# Altium PCB SynchConv_pcb.PcbDoc
Units mil, origin at the board's own origin, x right, y up, seen from the top; angles counter-clockwise.
Board outline 3543.26 x 2756.28 mil, 2 copper layers (Top Layer, Bottom Layer); 40 components, 21 nets, 96 pads, 289 vias.
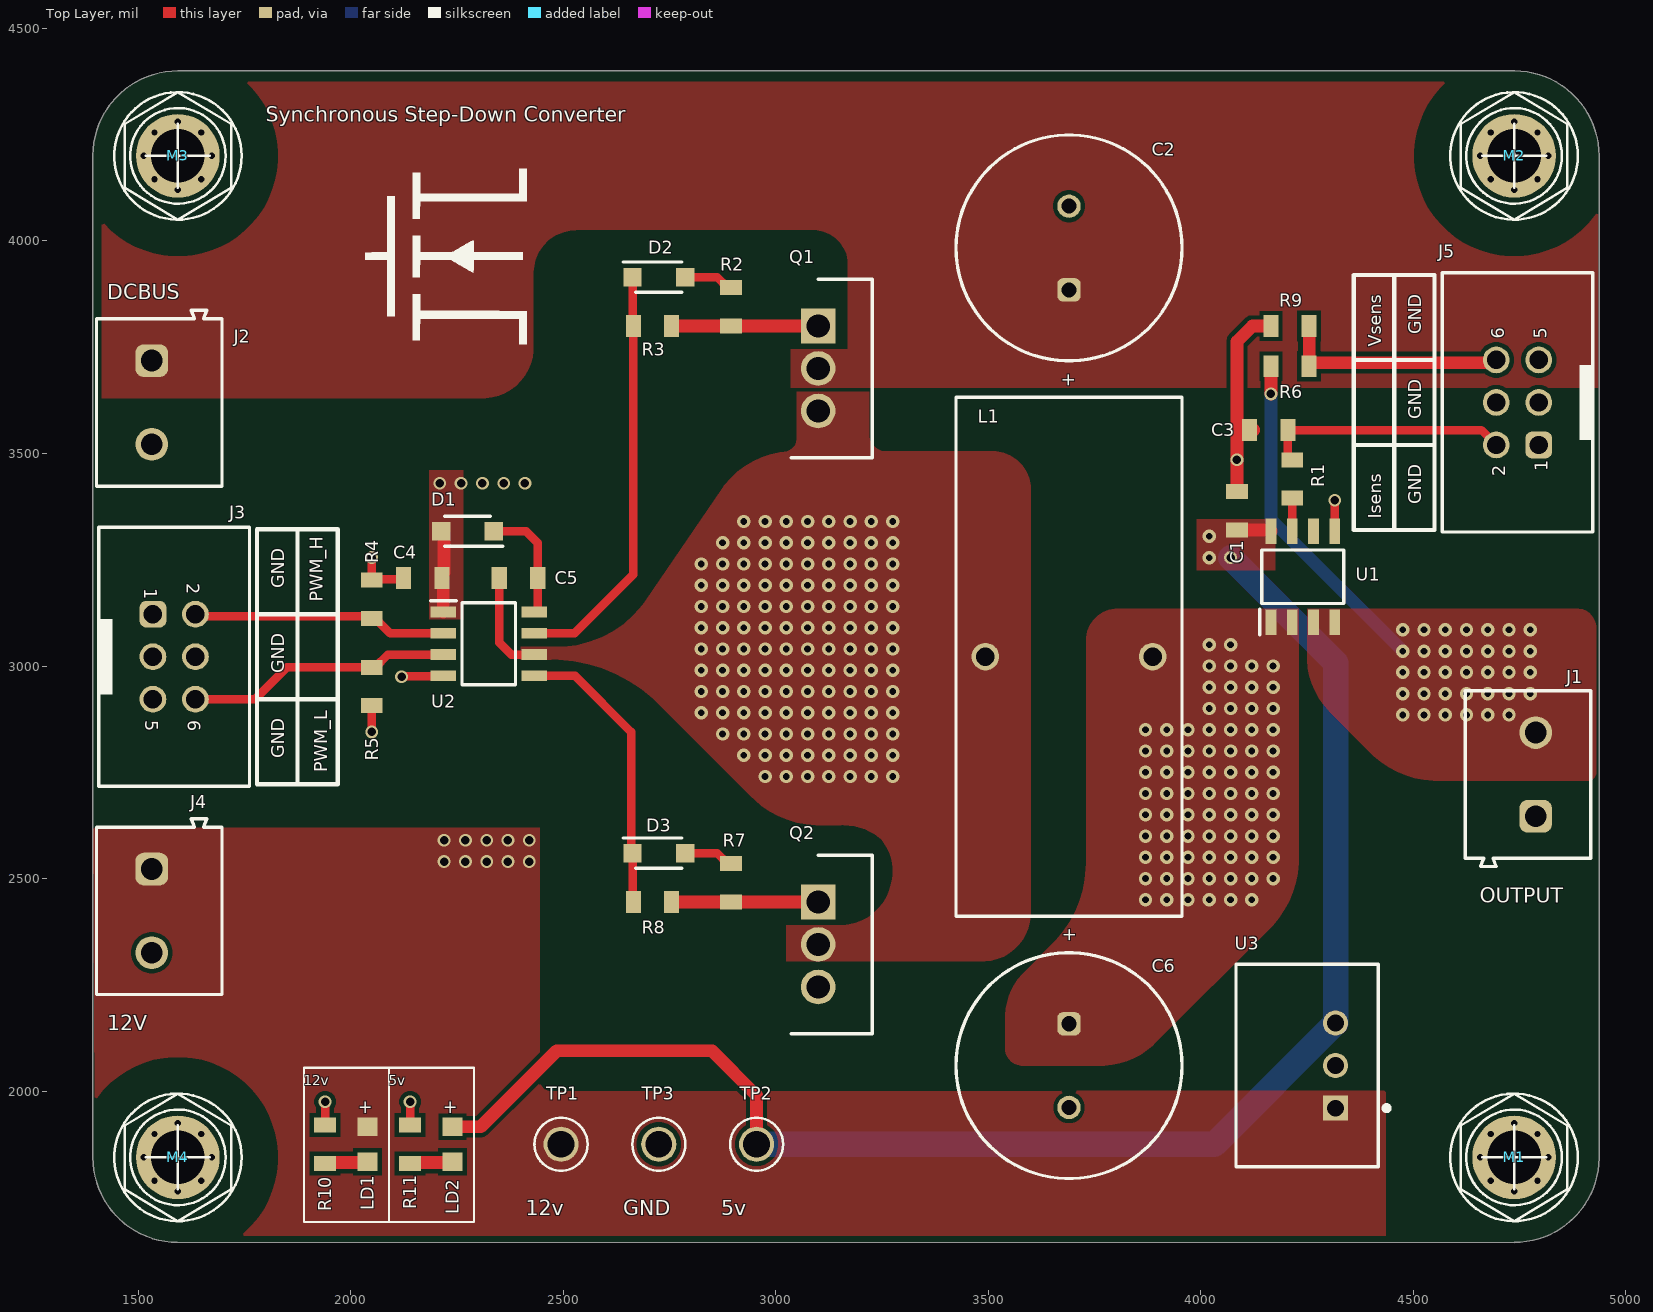
[diagram p0: Top Layer view]
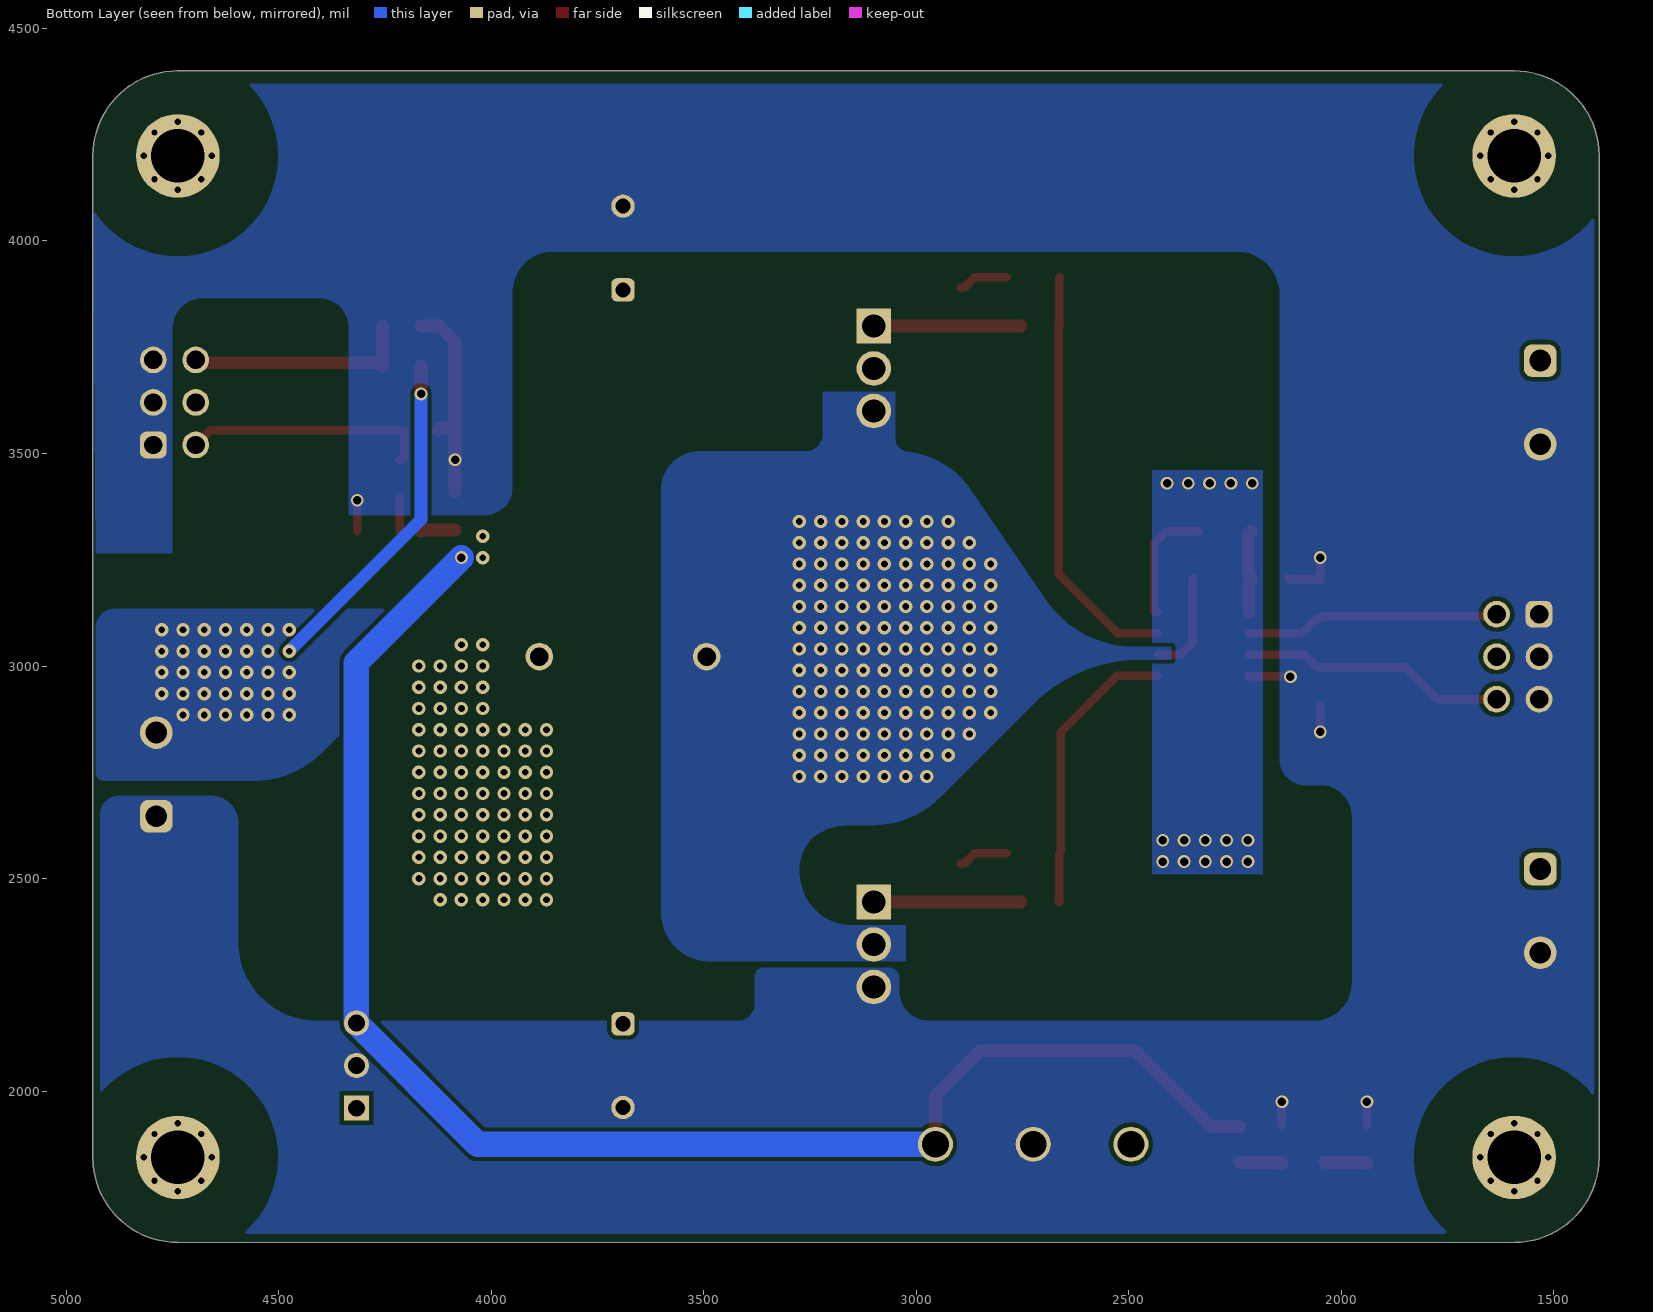
[diagram p1: Bottom Layer view, seen from below]
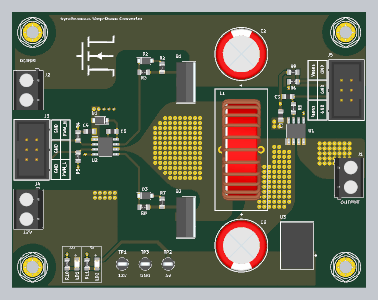
[diagram p2: 3D render of the assembled board from above, using the file's embedded part models]

## Layer stack, top to bottom
Top Solder: solder mask 0.4, Solder Resist, Dk 3.5
Top Layer: signal copper 1.4
Dielectric 1: dielectric 12.6, FR-4, Dk 4.8
Bottom Layer: signal copper 1.4
Bottom Solder: solder mask 0.4, Solder Resist, Dk 3.5

## Board outline
1592.65,1644.1 cw(c1593.74,1844.09) 1393.75,1844.1 1394,1844.1 1394,4201.09 1393.75,4201.09 cw(c1593.74,4200) 1593.75,4399.99 1593.75,4400 4738.1,4400 4738.1,4399.99 cw(c4737.01,4200) 4937,4199.99 4937.01,4199.99 4937.01,1843 4937,1843 cw(c4737.01,1844.09) 4737,1644.1 4737,1643.72

## Design rules (kind name [scope] priority, off if disabled: settings)
Clearance [All] p1: gap=10 ignorepadtopadclearanceinfootprint=FALSE except(0: Arc-Hole Track-Hole SMDPad-Hole THPad-Hole Via-Hole Fill-Hole Poly-Hole Region-Hole Text-Hole)
Height [All] p1: minheight=0 maxheight=10000 prefheight=500
PolygonConnect [All] p1: connectstyle=Direct reliefconductorwidth=10 reliefentries=4 polygonreliefangle="90 Angle" airgapwidth=10
RoomDefinition SynchConv_sch [InComponentClass('SynchConv_sch')] p1: confinementstyle=ConfineIn formatcopy=TRUE lockcomponents=FALSE outline 515,565 16025,565 16025,5670 515,5670
RoutingVias [All] p1: holewidth=20 width=30 viastyle="Through Hole" minholewidth=20 minwidth=30 maxholewidth=20 maxwidth=30
SolderMaskExpansion [All] p1: expansion=4 istentingtop=FALSE
Width [All] p1: maxlimit=1000 minlimit=10 preferedwidth=20 minimp=50.000000 maximp=50.000000 favimp=50.000000
29 further rules are at their usual default settings.

## Components (designator, comment, footprint, x,y, rotation, side; value= is the part's Value field where it differs from the comment)
C1 "100nF" CAP_0805 4085,3365 r270 top
C2 "470uF" WCAP-ATG5_D13H20 3690,3983.43 r270 top
C3 "100nF" CAP_0805 4160,3555 r0 top
C4 "100nF" CAP_0805 2170,3207 r0 top
C5 "100nF" CAP_0805 2395,3207 r0 top
C6 "470uF" WCAP-ATG5_D13H20 3690,2060 r90 top
D1 "SS34LWHRVG" SODFL3718X102N 2275,3317 r180 top
D2 "SS34LWHRVG" SODFL3718X102N 2725,3915 r0 top
D3 "SS34LWHRVG" SODFL3718X102N 2725,2560 r0 top
J1 "691502710002" 691502710002 4770,2745 r90 top
J2 "691502710002" 691502710002 1550,3620 r270 top
J3 "61200621621" 61200621621 1585,3022 r270 top
J4 "691502710002" 691502710002 1550,2424 r270 top
J5 "61200621621" 61200621621 4745,3620 r90 top
L1 "59µH, 5.4A" 744134 3690,3022 r90 top
LD1 "Green, 3.2V" WL-SMCW_0805 2040,1875 r90 top
LD2 "Green, 3.2V" WL-SMCW_0805 2240,1875 r90 top
M1 "mounting hole plated" "M3_Mountingholes plated" 4737.01,1844.09 r0 top
M2 "mounting hole plated" "M3_Mountingholes plated" 4737.01,4200 r0 top
M3 "mounting hole plated" "M3_Mountingholes plated" 1593.74,4200 r0 top
M4 "mounting hole plated" "M3_Mountingholes plated" 1593.74,1844.09 r0 top
Q1 "IRFB3077PBF" TO254P483X1016X1994-3P 3100,3800 r270 top
Q2 "IRFB3077PBF" TO254P483X1016X1994-3P 3100,2445 r270 top
R1 "1k" Res_0805 4215,3440 r270 top
R2 "4R7" Res_0805 2895,3845 r270 top
R3 "10R" Res_0805 2710,3800 r180 top
R4 "10k" Res_0805 2050,3157 r270 top
R5 "10k" Res_0805 2050,2952 r90 top
R6 "3k" Res_0805 4210,3705 r0 top
R7 "4R7" Res_0805 2895,2490 r270 top
R8 "10R" Res_0805 2710,2445 r180 top
R9 "1k" Res_0805 4210,3800 r180 top
R10 "1k" Res_0805 1940,1875 r270 top
R11 "1k" Res_0805 2140,1875 r270 top
TP1 "TP_big" TP_big 2495,1875 r0 top
TP2 "TP_big" TP_big 2955,1875 r0 top
TP3 "TP_big" TP_big 2725,1875 r0 top
U1 "TMCS1107A4BQDRQ1" SOIC127P600X175-8N 4240,3210 r90 top
U2 "FL73282MX" SOIC127P600X175-8N 2325,3052 r0 top
U3 "8-42Vin, 5Vout, 1Aout" 173010x35 4250,2060 r90 top

## Footprints (in the part's own frame and the unit in brackets; to place one, negate y for a bottom-side part, rotate by r counter-clockwise, add the part's x,y. Pads: shape width x height; smd on the part's side, far side on the other; paste and mask are expansions set on the pad)
173010x35 [mm] "Fixed Step Down Regulator Module, SIP-3, body 11.6x8mm"
  rect 1.5x1.5 hole 1: 1(-2.54,-1.7)
  round 1.5 hole 1: 2(0,-1.7) 3(2.54,-1.7)
  silkscreen extent -6.05,-4.9 6.05,4.25, body extent -5.8,-4 5.8,4, height 10.45
744134 [mm] "THT Leaded Toroidal Storage Choke, body 31x13.5mm"
  round 1.65 hole 1.1: 1(0,5) 2(0,-5)
  silkscreen extent -15.5,-6.75 15.5,6.75, body extent -12.96,-5.45 12.96,5.45, height 25.56
61200621621 [mm] "6 pins, straight, gold plating"
  rrect50% 1.6x1.6 hole 1.1: 1(-2.54,-1.27)
  round 1.6 hole 1.1: 2(-2.54,1.27) 3(0,-1.27) 4(0,1.27) 5(2.54,-1.27) 6(2.54,1.27)
  silkscreen extent -7.74,-4.5 7.74,4.5, body extent -7.64,-4.43 7.64,4.75, height 9.13
691502710002 [mm] "5,00mm - modular - Reflow compatible - Horizontal entry with pressure clamp - 02p"
  rrect50% 1.95x1.95 hole 1.3: 1(-2.5,-0.45)
  round 1.95 hole 1.3: 2(2.5,-0.45)
  silkscreen extent -5.5,-3.75 5,3.75, body extent -5.5,-3.75 5,3.75, height 10.1
CAP_0805 [mm] "Ceramic Capacitors, body 2x1.25mm"
  rect 0.9x1.3 smd: 1(-1.15,0) 2(1.15,0)
  body extent -1,-0.62 1,0.63, height 0.8
"M3_Mountingholes plated" [mm]
  round 5 hole 3.2: 1(0,0)
  silkscreen extent -3.81,-3.81 3.81,3.81
Res_0805 [mm] "Thick Film Resistors, SMT, body size 2x1.25mm"
  rect 0.9x1.3 smd: 1(-1.143,0) 2(1.143,0)
  body extent -0.98,-0.64 1.02,0.61, height 0.6
SODFL3718X102N [mm]
  rect 1.09x1.11 smd: 1(-1.575,0) 2(1.575,0)
  silkscreen extent -2.12,-0.9 1.38,0.9, body extent -1.85,-0.9 1.85,0.9, height 1.02
SOIC127P600X175-8N [mm]
  rect 1.525x0.65 smd: 1(-2.712,1.905) 2(-2.712,0.635) 3(-2.712,-0.635) 4(-2.712,-1.905) 5(2.712,-1.905) 6(2.712,-0.635) 7(2.712,0.635) 8(2.712,1.905)
  silkscreen extent -3.47,-2.45 1.6,2.58, body extent -3,-2.45 3,2.45, height 1.75
TO254P483X1016X1994-3P [mm]
  rect 2.07x2.07 hole 1.38: 1(0,0)
  round 2.07 hole 1.38: 2(2.54,0) 3(5.08,0)
  silkscreen extent -2.8,-1.61 7.88,3.22, body extent -2.54,-1.61 7.62,3.22, height 18.86
TP_big [mm]
  round 2.1 hole 1.6 paste-2: 1(0,0)
  silkscreen extent -1.59,-1.58 1.59,1.58, body extent -1.59,-1.59 1.59,1.59, height 8.13
WCAP-ATG5_D13H20 [mm] "Aluminum Electrolytic Capacitors, 13x20mm"
  rrect50% 1.4x1.4 hole 0.9: 1(2.5,0)
  round 1.4 hole 0.9: 2(-2.5,0)
  silkscreen extent -6.75,-6.75 6.75,6.75, body extent -6.49,-6.5 6.5,6.5, height 20.31
WL-SMCW_0805 [mm] "SMD Mono-color Chip LED, body 2.0x1.25mm"
  rect 1.1x1.2 smd: 1(-1.05,0) 2(1.05,0)
  body extent -1,-0.63 1,0.62, height 0.7

## Part data
C1 C3 C4 C5: library part Cap_0805, "capacitor 0805", Capacitance Tolerance=+/-10%, Isolation Resistance=>=5GOhm, Manufacturer="Wurth Elektronik", Manufacturer Part Number=885012207098, Operating Temperature="-55 to +125degC", Rated Voltage=50VDC, Capacitance=100nF, Ceramic Type=X7R, ComponentLink1Description=Manufacturer, ComponentLink1URL=http://www.we-online.de, ComponentLink2Description=Datasheet, ComponentLink2URL=https://www.we-online.com/catalog/datasheet/885012207098.pdf, Dissipation Factor=#NAME?, Height=0.8mm, Mounting Technology=SMT, Packaging="Tape and Reel", Published Date="May 2020", Size=0805, Technical Reference=X7R0805104K050DFCT10000
C2 C6: library part 860020778021, "WCAP-ATG5 Aluminum Electrolytic Capacitor, Radial THT, D13xH20mm, 470uF, 63V", Capacitance Tolerance=+/-20%, Leakage Current=296.1uA, Manufacturer="Wurth Elektronik", Operating Temperature Max=105°C, Operating Temperature Min=-40°C, Rated Voltage (DC)=63V, Ripple Current=690mA, Capacitance=470uF, Category="Aluminum Electrolytic Capacitors", ComponentLink1Description="Manufacturer Link", ComponentLink1URL=https://www.we-online.com/redexpert/article/860020778021?ad, ComponentLink2Description=Datasheet, ComponentLink2URL=https://www.we-online.com/redexpert/spec/860020778021?ad, Diameter=13mm, Dissipation Factor=9%, Endurance=2000h, Height=20mm, Manufacturer Part Number=860020778021, Match Code=WCAP-ATG5, Mount="Through Hole", Packaging="Ammo Pack", Technical Reference=ATDI200471M063DSPACB000
D1 D2 D3: "Diode", Manufacturer_Name="Taiwan Semiconductor", Mouser Part Number=821-SS34LWHRVG, Arrow Part Number=SS34LWHRVG, Arrow Price/Stock=https://www.arrow.com/en/products/ss34lwhrvg/taiwan-semiconductor?region=nac, Datasheet Link=https://datasheet.datasheetarchive.com/originals/distributors/DKDS-20/389381.pdf, Height=1.02mm, Manufacturer_Part_Number=SS34LWHRVG, Mouser Price/Stock=https://www.mouser.co.uk/ProductDetail/Taiwan-Semiconductor/SS34LWHRVG?qs=5aG0NVq1C4zYvYQjFNyRbA%3D%3D
J1 J2 J4: "WR-TBL Series 5027 Horizontal Entry Modular, Through Hole, pitch 5mm, 2p", Manufacturer="Wurth Elektronik", Operating Temperature Max=130°C, Operating Temperature Min=-40°C, Rated Current=15A, Working Voltage=300V, Application="Pressure Clamp", Category="Terminal Blocks", ComponentLink1Description="Manufacturer Link", ComponentLink1URL=https://www.we-online.com/redexpert/article/691502710002?ad, ComponentLink2Description=Datasheet, ComponentLink2URL=https://www.we-online.com/redexpert/spec/691502710002?ad, Manufacturer Part Number=691502710002, Match Code=WR-TBL, Modularity=Yes, Mount="Through Hole", Orientation=Horizontal, Packaging=Box, PCB/Cable/Panel=PCB, Pin Number=2, Pitch=5mm
J3 J5: "WR-BHD Box Header, Male PCB side, pitch 2.54mm, THT, Straight, 6p", Contact Resistance=20mOhm, Insulation Resistance=1000MOhm, Manufacturer="Wurth Elektronik", Operating Temperature="-40 to +105degC", Rated Current=3A, Withstanding Voltage=500VAC, Working Voltage=250VAC, ComponentLink1Description=Manufacturer, ComponentLink1URL=http://www.we-online.de, ComponentLink2Description=Datasheet, ComponentLink2URL=https://www.we-online.com/catalog/datasheet/61200621621.pdf, Gender="Male PCB side", Length=15.28mm, Manufacturer Part Number=61200621621, Mounting Technology=THT, Packaging=Tray, Pin Number=6, Pitch=2.54mm, Published Date="August 2021", Type=Straight
L1: library part 744134, "WE-SI THT Leaded Toroidal Storage Choke, 59µH, 5.4A, 0.05Ω", DC Resistance Max=0.05Ω, Inductance=92µH, Manufacturer="Wurth Elektronik", Operating Temperature Max=105°C, Operating Temperature Min=-40°C, Rated Current=5.4A, Rated Inductance=59µH, Saturation Current=2.3A, Self Resonant Frequency=9MHz, Category="Shielded Power Inductors", ComponentLink1Description="Website Link", ComponentLink1URL=https://www.we-online.com/redexpert/article/744134?ad, ComponentLink2Description="Datasheet Link", ComponentLink2URL=https://www.we-online.com/redexpert/spec/744134?ad, Height=31mm, Length=31mm, Manufacturer Part Number=744134, Match Code=WE-SI, Mount="Through Hole", Packaging=Tray, Width=13.5mm
LD1 LD2: library part 150080GS75000, "WL-SMCW SMT Mono-color Chip LED Waterclear, size 0805, Green, 3.2V, 140deg", Emitting Color=Green, Forward Voltage typ.=3.2V, Operating Temperature="-40 to +85degC", Supplier Part Number 1=8154221, Chip Technology=InGaN, ComponentLink1Description=Manufacturer, ComponentLink1URL=http://www.we-online.de, ComponentLink2Description=Datasheet, ComponentLink2URL=https://www.we-online.com/catalog/datasheet/150080GS75000.pdf, Dominant Wavelength typ.=525nm, Luminous Intensity typ.=450mcd, Mounting Technology=SMT, Packaging="Tape and Reel", Part Number=150080GS75000, Peak Wavelength typ.=515nm, Published Date="December 2019", Publisher="Wurth Elektronik", Size=0805, Supplier 1=RSComponents, Viewing Angle=140deg
M1 M2 M3 M4: library part M3_MountungHole_plated, "M3 plated"
Q1 Q2: "MOSFET (N-Channel)", Manufacturer_Name=Infineon, Mouser Part Number=942-IRFB3077PBF, Arrow Part Number=IRFB3077PBF, Arrow Price/Stock=https://www.arrow.com/en/products/irfb3077pbf/infineon-technologies-ag, Datasheet Link=http://uk.rs-online.com/web/p/products/6504716, Height=4.83mm, Manufacturer_Part_Number=IRFB3077PBF, Mouser Price/Stock=https://www.mouser.co.uk/ProductDetail/Infineon-IR/IRFB3077PBF?qs=9%252BKlkBgLFf2abfAE7SiJEg%3D%3D
R1 R2 R3 R4 R5 R6 R7 R8 R9 R10 R11: library part Res_0805, "SMT Thick Film Resistor, size 0805, 0.125W", Package=0805, Tolerance=1%
TP1 TP2 TP3: "test point big"
U1: "SENSOR CURRENT HALL 5.6A 8SOIC", Manufacturer_Name="Texas Instruments", Datasheet Link=https://www.ti.com/lit/ds/symlink/tmcs1107-q1.pdf?ts=1634009705469&ref_url=https%253A%252F%252Fwww.ti.com%252Fsitesearch%252Fdocs%252Funiversalsearch.tsp%253FlangPref%253Den-US%2526searchTerm%253DTMCS1107A4UQDRQ1%2526nr%253D2, Height=1.75mm, Manufacturer_Part_Number=TMCS1107A4BQDRQ1
U2: "Driver di porta 900V Half-Bridge Gate Driver", Manufacturer_Name=onsemi, Datasheet Link=https://componentsearchengine.com/Datasheets/1/FL73282MX.pdf, Height=1.75mm, Manufacturer_Part_Number=FL73282MX
U3: library part 173010535, "MagI3C-FDSM Fixed Step Down Regulator Module, SIP-3, 8-36Vin, 5Vout, 1Aout", Input Voltage=8-42V, Manufacturer Part Number=173010542, Operating Temperature="-40 to +85degC", Output Current=1A, Output Voltage=5V, ComponentLink1Description=Manufacturer, ComponentLink1URL=http://www.we-online.de, ComponentLink2Description=Datasheet, ComponentLink2URL=https://www.we-online.com/catalog/datasheet/173010542.pdf, Height=10.5mm, Length=11.6mm, Mounting Technology=THT, Packaging=Tube, Published Date="March 2020", Publisher="Wurth Elektronik", Size=SIP-3, Width=8.5mm

## Via types
v1: diameter 31.5, hole 15.75, Top Layer to Bottom Layer, 233 vias
v2: diameter 23.62, hole 15, Top Layer to Bottom Layer, 32 vias
v3: diameter 30, hole 20, Top Layer to Bottom Layer, 24 vias

## Nets (pads, with @x,y where several pads share a name; then routed paths per layer and width w, separated by ;. In a path a pad name is that pad's centre, name@x,y a point inside that pad or via, vN(x,y) a via of type N, cw(c..) or ccw(c..) an arc to the next point about the centre after c; other vN are vias at no path point)
5v: C1.2 LD2.2 TP2.1 U1.8 U3.3 | length 3706.4
  Top Layer w30: LD2.2 2306.34,1916.34 2485,2095 2850,2095 2955,1990 TP2.1 ; C1.2 4162.8,3319.72 4165,3317.52 U1.8
  Bottom Layer w60: TP2.1 4031.93,1875 U3.3 4316.93,3008.07 v3(4070,3255)
  other v1: 4020,3255 4020,3305
12v: C4.2 D1.2 J4.1 LD1.2 TP1.1 U2.1 U3.1 | length 196.1
  Top Layer w30: D1.2 2219.45,3310.54 2219.45,3293.13 2220,3292.58 2220,3219.6 2215.28,3214.87 2215.28,3199.13 2218.23,3196.17 U2.1
  other v3: 2220,2540 2270,2540 2320,2540 2370,2540 2420,2540 2220,2590 2270,2590 2320,2590 2370,2590 2420,2590 2210,3430 2260,3430 2310,3430 2360,3430 2410,3430
CURR_IN: C6.1 L1.2 U1.1 U1.2
  other v1: 3870,2450 3920,2450 3970,2450 4020,2450 4070,2450 4120,2450 3870,2500 3920,2500 3970,2500 4020,2500 4070,2500 4120,2500 4170,2500 3870,2550 3920,2550 3970,2550 4020,2550 4070,2550 4120,2550 4170,2550 3870,2600 3920,2600 3970,2600 4020,2600 4070,2600 4120,2600 4170,2600 3870,2650 3920,2650 3970,2650 4020,2650 4070,2650 4120,2650 4170,2650 3870,2700 3920,2700 3970,2700 4020,2700 4070,2700 4120,2700 4170,2700 3870,2750 3920,2750 3970,2750 4020,2750 4070,2750 4120,2750 4170,2750 3870,2800 3920,2800 3970,2800 4020,2800 4070,2800 4120,2800 4170,2800 3870,2850 3920,2850 3970,2850 4020,2850 4070,2850 4120,2850 4170,2850 4020,2900 4070,2900 4120,2900 4170,2900 4020,2950 4070,2950 4120,2950 4170,2950 4020,3000 4070,3000 4120,3000 4170,3000 4020,3050 4070,3050
CURR_OUT: J1.2 R6.1 U1.3 U1.4 | length 798.4
  Top Layer w30: v3(4165,3640) R6.1
  Bottom Layer w30: v3(4165,3640) 4165,3345 v1(4475,3035)
  other v1: 4475,2885 4525,2885 4575,2885 4625,2885 4675,2885 4725,2885 4475,2935 4525,2935 4575,2935 4625,2935 4675,2935 4725,2935 4775,2935 4475,2985 4525,2985 4575,2985 4625,2985 4675,2985 4725,2985 4775,2985 4525,3035 4575,3035 4625,3035 4675,3035 4725,3035 4775,3035 4475,3085 4525,3085 4575,3085 4625,3085 4675,3085 4725,3085 4775,3085
DC_BUS: C2.1 J2.1 Q1.2
GND: C1.1 C2.2 C3.1 C4.1 C6.2 J1.1 J2.2 J3.1 J3.3 J3.5 J4.2 J5.1 J5.3 J5.5 Q2.3 R4.1 R5.1 R9.2 R10.1 R11.1 TP3.1 U1.5 U2.4 U3.2 | length 964.1
  Top Layer w20: R10.1 v3(1940,1975) ; v3(2050,2845) R5.1 ; v3(2050,3255) R4.1 2052.5,3204.5 2122.22,3204.5 C4.1 ; v3(2120,2975) 2121,2976 2217.23,2976 U2.4 ; R11.1 v3(2140,1975) ; U1.5 v3(4315,3390)
  Top Layer w30: C1.1 v3(4085,3485) 4085,3560 ; C3.1@4124.72,3555 4119.72,3560 4085,3560 ; R9.2 4121.72,3800 4085,3763.28 4085,3560
Isens: C3.2 J5.2 R1.1 | length 569.8
  Top Layer w20: C3.2 4205,3554.72 4205,3492.72 4212.72,3485 R1.1 ; C3.2@4215.28,3555 4660,3555 J5.2
NetC5_1: C5.1 L1.1 Q1.3 Q2.2 U2.6 | length 245.5
  Top Layer w20: C5.1 2349.72,3055.28 2378,3027 U2.6
  other v1: 2975,2740 3025,2740 3075,2740 3125,2740 3175,2740 3225,2740 3275,2740 2925,2790 2975,2790 3025,2790 3075,2790 3125,2790 3175,2790 3225,2790 3275,2790 2875,2840 2925,2840 2975,2840 3025,2840 3075,2840 3125,2840 3175,2840 3225,2840 3275,2840 2825,2890 2875,2890 2925,2890 2975,2890 3025,2890 3075,2890 3125,2890 3175,2890 3225,2890 3275,2890 2825,2940 2875,2940 2925,2940 2975,2940 3025,2940 3075,2940 3125,2940 3175,2940 3225,2940 3275,2940 2825,2990 2875,2990 2925,2990 2975,2990 3025,2990 3075,2990 3125,2990 3175,2990 3225,2990 3275,2990 2825,3040 2875,3040 2925,3040 2975,3040 3025,3040 3075,3040 3125,3040 3175,3040 3225,3040 3275,3040 2825,3090 2875,3090 2925,3090 2975,3090 3025,3090 3075,3090 3125,3090 3175,3090 3225,3090 3275,3090 2825,3140 2875,3140 2925,3140 2975,3140 3025,3140 3075,3140 3125,3140 3175,3140 3225,3140 3275,3140 2825,3190 2875,3190 2925,3190 2975,3190 3025,3190 3075,3190 3125,3190 3175,3190 3225,3190 3275,3190 2825,3240 2875,3240 2925,3240 2975,3240 3025,3240 3075,3240 3125,3240 3175,3240 3225,3240 3275,3240 2875,3290 2925,3290 2975,3290 3025,3290 3075,3290 3125,3290 3175,3290 3225,3290 3275,3290 2925,3340 2975,3340 3025,3340 3075,3340 3125,3340 3175,3340 3225,3340 3275,3340
NetC5_2: C5.2 D1.1 U2.8 | length 284.2
  Top Layer w20: D1.1 2413,3317 2440.28,3289.72 C5.2 2440.28,3129.8 2437.48,3127 U2.8
NetD2_1: D2.1 R3.2 U2.7 | length 991.2
  Top Layer w20: U2.7 2527,3077 2665,3215 R3.2 2664,3801 2664,3914 D2.1
NetD2_2: D2.2 R2.1 | length 118.3
  Top Layer w20: D2.2 2862.13,3915 2887.13,3890 R2.1
NetD3_1: D3.1 R8.2 U2.5 | length 685
  Top Layer w20: U2.5 2528,2977 2660,2845 2660,2562.99 D3.1 2664,2559 2664,2446 R8.2
NetD3_2: D3.2 R7.1 | length 118.3
  Top Layer w20: D3.2 2862.13,2560 2887.13,2535 R7.1
NetLD1_1: LD1.1 R10.2 | length 101.5
  Top Layer w30: R10.2 1941.83,1831.83 2038.17,1831.83 LD1.1
NetLD2_1: LD2.1 R11.2 | length 101.5
  Top Layer w30: R11.2 2141.83,1831.83 2238.17,1831.83 LD2.1
NetQ1_1: Q1.1 R2.2 R3.1 | length 345
  Top Layer w30: R3.1 R2.2 Q1.1
NetQ2_1: Q2.1 R7.2 R8.1 | length 345
  Top Layer w30: R8.1 R7.2 Q2.1
NetR1_2: R1.2 U1.7 | length 78.2
  Top Layer w20: U1.7 R1.2
PWM_HIGH: J3.2 R4.2 U2.2 | length 601.9
  Top Layer w20: J3.2 1640,3117 2045,3117 R4.2 2057.87,3112 2092.87,3077 U2.2
PWM_LOW: J3.6 R5.2 U2.3 | length 626.7
  Top Layer w20: J3.6 1775,2922 1850,2997 R5.2 2057.87,2997 2087.87,3027 U2.3
Vsens: J5.6 R6.2 R9.1 | length 538.7
  Top Layer w30: R6.2 R6.2@4255,3710.97 ; R9.1 R6.2@4255,3710.97 ; J5.6 4688.69,3713.69 4257.72,3713.69 R6.2@4255,3710.97
pads on no net: J3.4 J5.4 M1.1 M2.1 M3.1 M4.1 U1.6
copper on no net:
  other v2: 1593.74,1764.09 4737.01,1764.09 1538.74,1789.09 1648.74,1789.09 4682.01,1789.09 4792.01,1789.09 1513.74,1844.09 1673.74,1844.09 4657.01,1844.09 4817.01,1844.09 1538.74,1899.09 1648.74,1899.09 4682.01,1899.09 4792.01,1899.09 1593.74,1924.09 4737.01,1924.09 1593.74,4120 4737.01,4120 1538.74,4145 1648.74,4145 4682.01,4145 4792.01,4145 1513.74,4200 1673.74,4200 4657.01,4200 4817.01,4200 1538.74,4255 1648.74,4255 4682.01,4255 4792.01,4255 1593.74,4280 4737.01,4280

## Polygon pours and split planes (outlines as drawn)
DC_BUS on Top Layer "DC_BUS_L01_P003" (solid, pour order 3): 2430,3750 2430,3925 cw(c2530,3925) 2530,4025 3090,4025 cw(c3090,3945) 3170,3945 3170,3745 3035,3745 3035,3655 4935,3655 4935,4375 1415,4375 1415,3630 2310,3630 ccw(c2310,3750)
CURR_IN on Top Layer "CURR_IN_L01_P001" (solid, pour order 1): 4230,3135 4230,2547.43 cw(c3994.8,2547.42) 4161.11,2381.11 3893.28,2113.28 cw(c3764.64,2241.92) 3764.64,2060 3580,2060 cw(c3580,2100) 3540,2100 3540,2171.72 cw(c3692.78,2171.72) 3584.75,2279.75 3651.11,2346.11 ccw(c3460.65,2536.57) 3730,2536.57 3730,3060 cw(c3805,3060) 3805,3135
NetC5_1 on Top Layer "NETC5_1_L01_P010" (solid, pour order 10): 3050,3536.71 3050,3645 3220,3645 3220,3545 ccw(c3260,3545) 3260,3505 3510,3505 cw(c3510,3415) 3600,3415 3600,2420 cw(c3485,2420) 3485,2305 3025,2305 3025,2390 3150,2390 ccw(c3150,2514.99) 3274.79,2507.72 ccw(c3159.2,2517.89) 3248.11,2592.45 ccw(c3161.67,2494.9) 3153.79,2625 3106,2625 cw(c3106,2856.77) 2942.11,2692.89 2724.35,2910.65 ccw(c2472.43,2658.74) 2472.43,3015 2400,3015 2400,3045 2485.27,3045 ccw(c2485.28,3300.23) 2696.01,3156.24 2873.3,3415.68 cw(c3042.51,3300.05) 3020.47,3503.81 ccw(c3016.91,3536.71)
CURR_OUT on Top Layer "CURR_OUT_L01_P009" (solid, pour order 9): 4250,3135 4250,3022.43 ccw(c4436.92,3022.43) 4304.75,2890.25 4399.64,2795.36 ccw(c4557.43,2953.14) 4557.43,2730 4910,2730 ccw(c4910,2750) 4930,2750 4930,3090 ccw(c4885,3090) 4885,3135
5v on Top Layer "5V_L01_P008" (solid, pour order 8): 4175,3345 3990,3345 3990,3225 4175,3225
12v on Top Layer "12V_L01_P006" (solid, pour order 6): 2185,3110 2265,3110 2265,3460 2185,3460
12v on Top Layer "12V_L01_P004" (solid, pour order 4): 2445,2620 2445,2024.99 ccw(c2469.98,2024.99) 2469.99,2000.01 15395.51,2005 4435,2005 4435,1660 1399.92,1660 1395,2620
GND on Bottom Layer "Bottom Layer-GND" (solid, pour order 13): 1405,1665 4920,1665 4920,2650 ccw(c4875,2650) 4875,2695 4660,2695 ccw(c4660,2630) 4595,2630 4595,2350 cw(c4410,2350) 4410,2165 3420,2165 cw(c3420,2205) 3380,2205 3380,2270 ccw(c3360,2270) 3360.01,2290 3065,2290 ccw(c3065,2265) 3040,2265 3040,2235 cw(c2970,2235) 2970,2165 2065,2165 cw(c2065,2255) 1975,2255 1975,2445 1975,2645 cw(c2050,2645) 2050,2720 2085,2720 ccw(c2085,2780) 2145,2780 2145,3875 cw(c2245,3875) 2245,3975 3855,3975 cw(c3855,3880) 3950,3880 3950,3420 ccw(c4015,3420) 4015,3355 4335,3355 4335,3796.39 cw(c4403.61,3796.39) 4403.61,3865 4680,3865 cw(c4680,3795) 4750,3795 4750,3265 4930,3265 4938.37,4370 2145,4370 1405,4370
NetC5_1 on Bottom Layer "NETC5_1_L02_P000" (solid, pour order 0): 3050,3536.71 3050,3645 3220,3645 3220,3545 ccw(c3260,3545) 3260,3505 3510,3505 cw(c3510,3415) 3600,3415 3600,2420 cw(c3485,2420) 3485,2305 3025,2305 3025,2390 3150,2390 ccw(c3150,2514.99) 3274.79,2507.72 ccw(c3159.2,2517.89) 3248.11,2592.45 ccw(c3161.67,2494.9) 3153.79,2625 3106,2625 cw(c3106,2856.77) 2942.11,2692.89 2724.35,2910.65 ccw(c2472.43,2658.74) 2472.43,3015 2400,3015 2400,3045 2485.27,3045 ccw(c2485.28,3300.23) 2696.01,3156.24 2873.3,3415.68 cw(c3042.51,3300.05) 3020.47,3503.81 ccw(c3016.91,3536.71)
CURR_OUT on Bottom Layer "CURR_OUT_L02_P002" (solid, pour order 2): 4250,3135 4250,3022.43 ccw(c4436.92,3022.43) 4304.75,2890.25 4399.64,2795.36 ccw(c4557.43,2953.14) 4557.43,2730 4910,2730 ccw(c4910,2750) 4930,2750 4930,3090 ccw(c4885,3090) 4885,3135
12v on Bottom Layer "12V_L02_P007" (solid, pour order 7): 2185,3460 2185,2510 2445,2510 2445,3460

## Other copper
Top Layer:
  pour cut-out: 4737.01,3963.95 cw(c4737.01,4200) 4500.96,4200 cw(c4737.01,4200) 4737.01,4436.05 cw(c4737.01,4200) 4973.06,4200 cw(c4737.01,4200)
  pour cut-out: 4737.01,1608.05 cw(c4737.01,1844.09) 4500.96,1844.09 cw(c4737.01,1844.09) 4737.01,2080.14 cw(c4737.01,1844.09) 4973.06,1844.09 cw(c4737.01,1844.09)
  pour cut-out: 1593.74,1608.05 cw(c1593.74,1844.09) 1357.69,1844.09 cw(c1593.74,1844.09) 1593.74,2080.14 cw(c1593.74,1844.09) 1829.79,1844.09 cw(c1593.74,1844.09)
  pour cut-out: 1593.74,3963.95 cw(c1593.74,4200) 1357.69,4200 cw(c1593.74,4200) 1593.74,4436.05 cw(c1593.74,4200) 1829.79,4200 cw(c1593.74,4200)
Bottom Layer:
  pour cut-out: 4737.01,3963.95 cw(c4737.01,4200) 4500.96,4200 cw(c4737.01,4200) 4737.01,4436.05 cw(c4737.01,4200) 4973.06,4200 cw(c4737.01,4200)
  pour cut-out: 4737.01,1608.05 cw(c4737.01,1844.09) 4500.96,1844.09 cw(c4737.01,1844.09) 4737.01,2080.14 cw(c4737.01,1844.09) 4973.06,1844.09 cw(c4737.01,1844.09)
  pour cut-out: 1593.74,1608.05 cw(c1593.74,1844.09) 1357.69,1844.09 cw(c1593.74,1844.09) 1593.74,2080.14 cw(c1593.74,1844.09) 1829.79,1844.09 cw(c1593.74,1844.09)
  pour cut-out: 1593.74,3963.95 cw(c1593.74,4200) 1357.69,4200 cw(c1593.74,4200) 1593.74,4436.05 cw(c1593.74,4200) 1829.79,4200 cw(c1593.74,4200)

## Silkscreen, mask and mechanical layers (free items; w line width, h text height)
Top Overlay:
  drawing of 23 lines, arcs and shapes, not listed
  text "Synchronous Step-Down Converter" at 1800.83,4268.72 h60
  text "DCBUS" at 1427.67,3851.38 h60
  text "GND" at 4519,3781 h30 r90
  text "Vsens" at 4424,3751 h30 r90
  text "GND" at 4519,3581 h30 r90
  text "GND" at 4519,3381 h30 r90
  text "Isens" at 4424,3346 h30 r90
  text "GND" at 1844,3183 h30 r90
  text "PWM_H" at 1934,3151 h30 r90
  text "GND" at 1844,2983 h30 r90
  text "GND" at 1844,2783 h30 r90
  text "PWM_L" at 1945,2750 h30 r90
  text "OUTPUT" at 4656.34,2431.38 h60
  text "12V" at 1427.67,2131.38 h60
  text "12v" at 1890,2005 h40
  text "5v" at 2090,2005 h40
  text "12v" at 2411.5,1696.38 h60
  text "GND" at 2641.5,1696.38 h60
  text "5v" at 2871.5,1696.38 h60
Board:
  lines w10: 1393.75,1844.1 ccw(c1593.74,1844.09) 1592.65,1644.1 ; 1393.75,4201.09 cw(c1593.74,4200) 1593.75,4399.99 4738.1,4400 cw(c4737.01,4200) 4937,4199.99 4937.01,1843 cw(c4737.01,1844.09) 4737,1644.1 ; 1394,1844.1 1394,4201.09 ; 1592.65,1643.72 4737,1643.72

## Dimensions
4738.1,4400 to 4737,1643.72 on Mechanical 1
4737.01,4200 to 4937.01,4400 on Mechanical 1
4737.01,4200 to 4937.01,4400 on Mechanical 1
1593.74,1844.09 to 1393.74,1644.09 on Mechanical 1
1593.74,1844.09 to 1393.74,1644.09 on Mechanical 1
1593.74,4200 to 1393.74,4400 on Mechanical 1
1393.74,4400 to 4937.01,4400 on Mechanical 1
4737.01,1844.09 to 4937.01,1644.09 on Mechanical 13
4737.01,1844.09 to 4937.01,1644.09 on Mechanical 13
1593.74,4200 to 1000,4400 on Mechanical 1

## Text inside footprints (layer, text, board x,y; h text height)
C2: Top Overlay "+" at 3675,3690 h30 r270
C6: Top Overlay "+" at 3705,2350 h30 r90
J3: Top Overlay "1" at 1514.13,3183.42 h30 r270; Top Overlay "6" at 1616.5,2872.39 h30 r270; Top Overlay "2" at 1614.13,3195.23 h30 r270; Top Overlay "5" at 1516.5,2872.39 h30 r270
J5: Top Overlay "5" at 4813.5,3769.61 h30 r90; Top Overlay "2" at 4715.87,3446.77 h30 r90; Top Overlay "6" at 4713.5,3769.61 h30 r90; Top Overlay "1" at 4815.87,3458.58 h30 r90
LD1: Top Overlay "+" at 2051.81,1975.39 h30 r180
LD2: Top Overlay "+" at 2251.81,1975.39 h30 r180